# EAGLE board main_schematic3 (EAGLE 7.1.0)
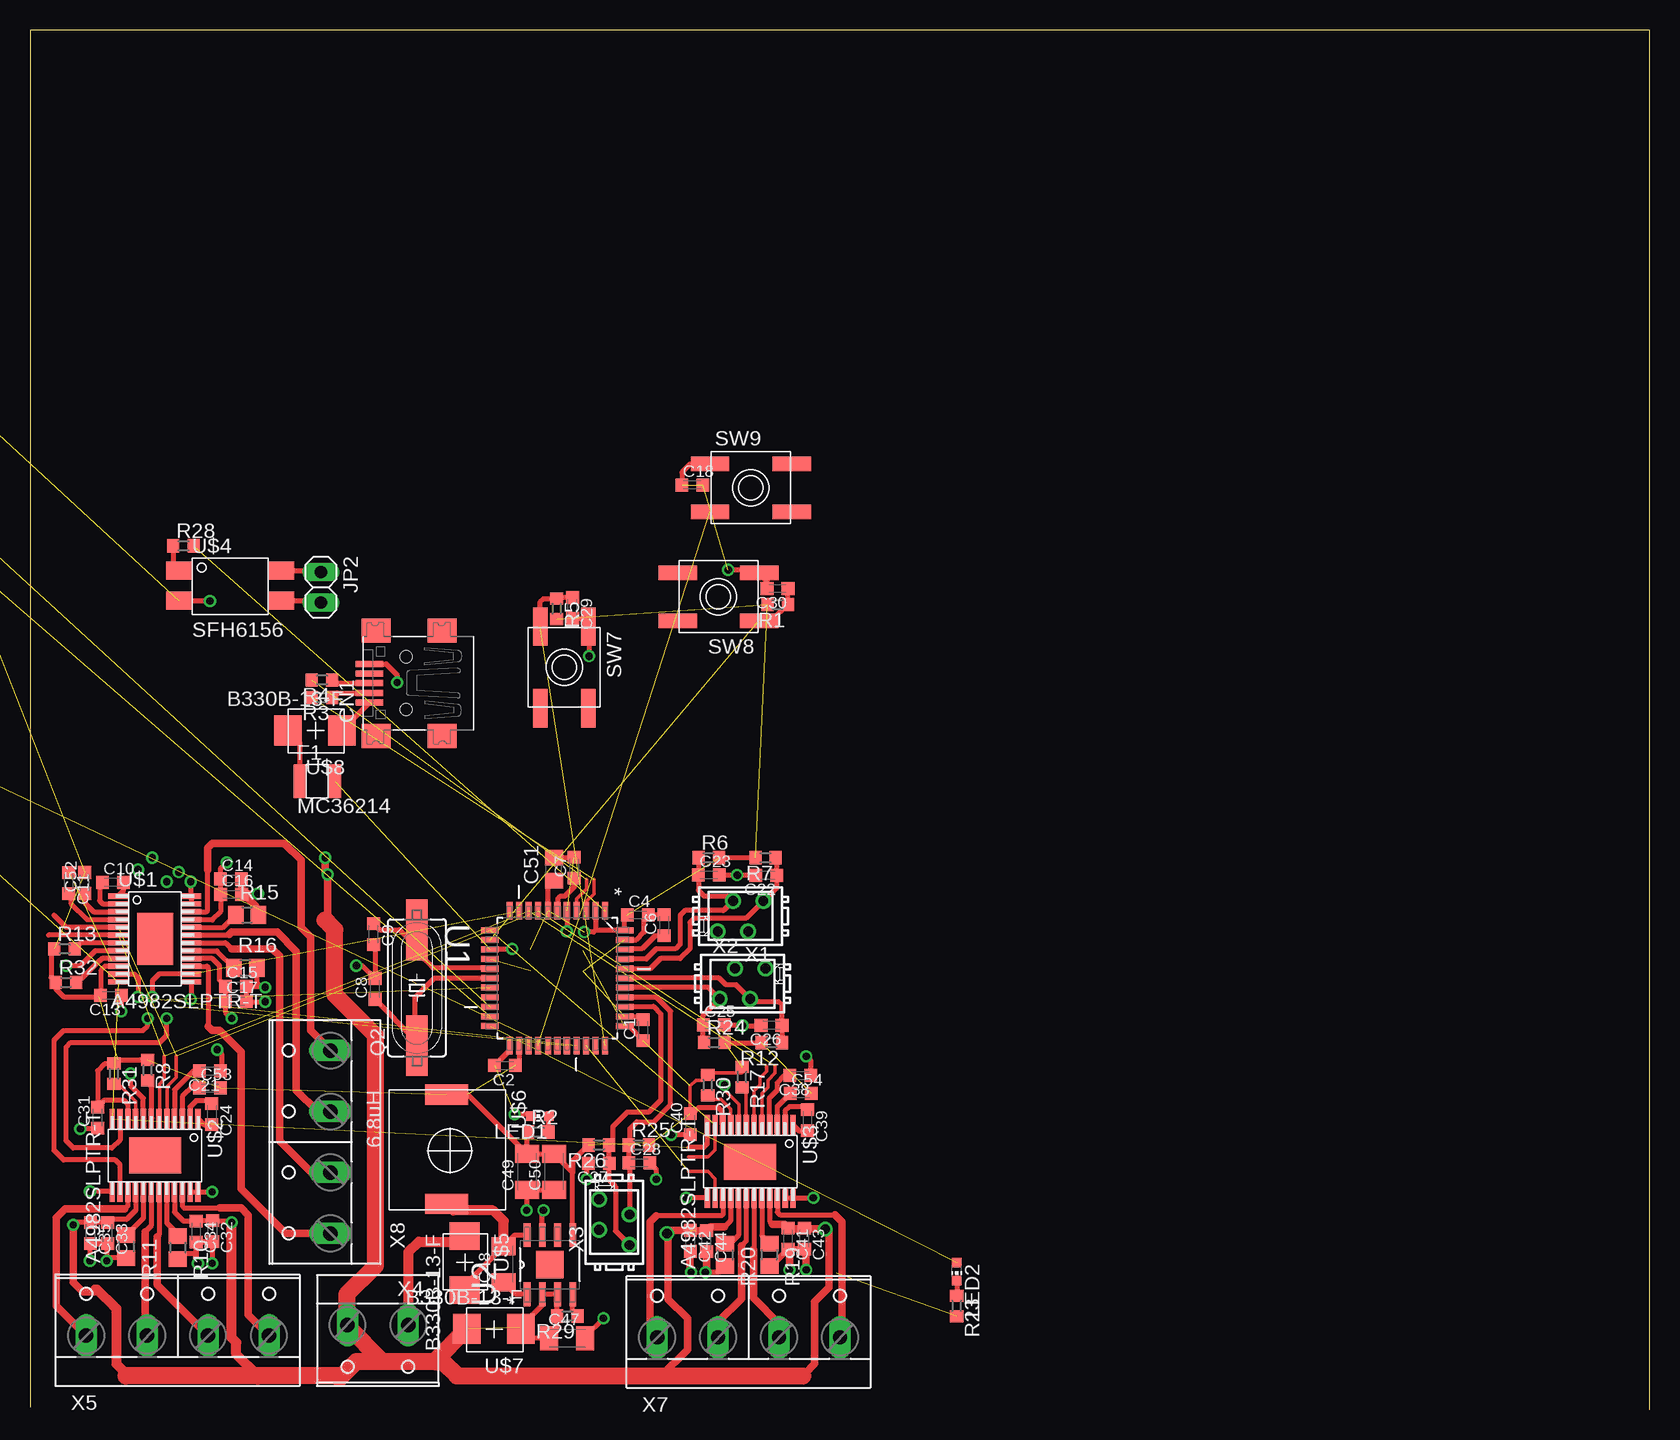
[diagram p0: board, top side]
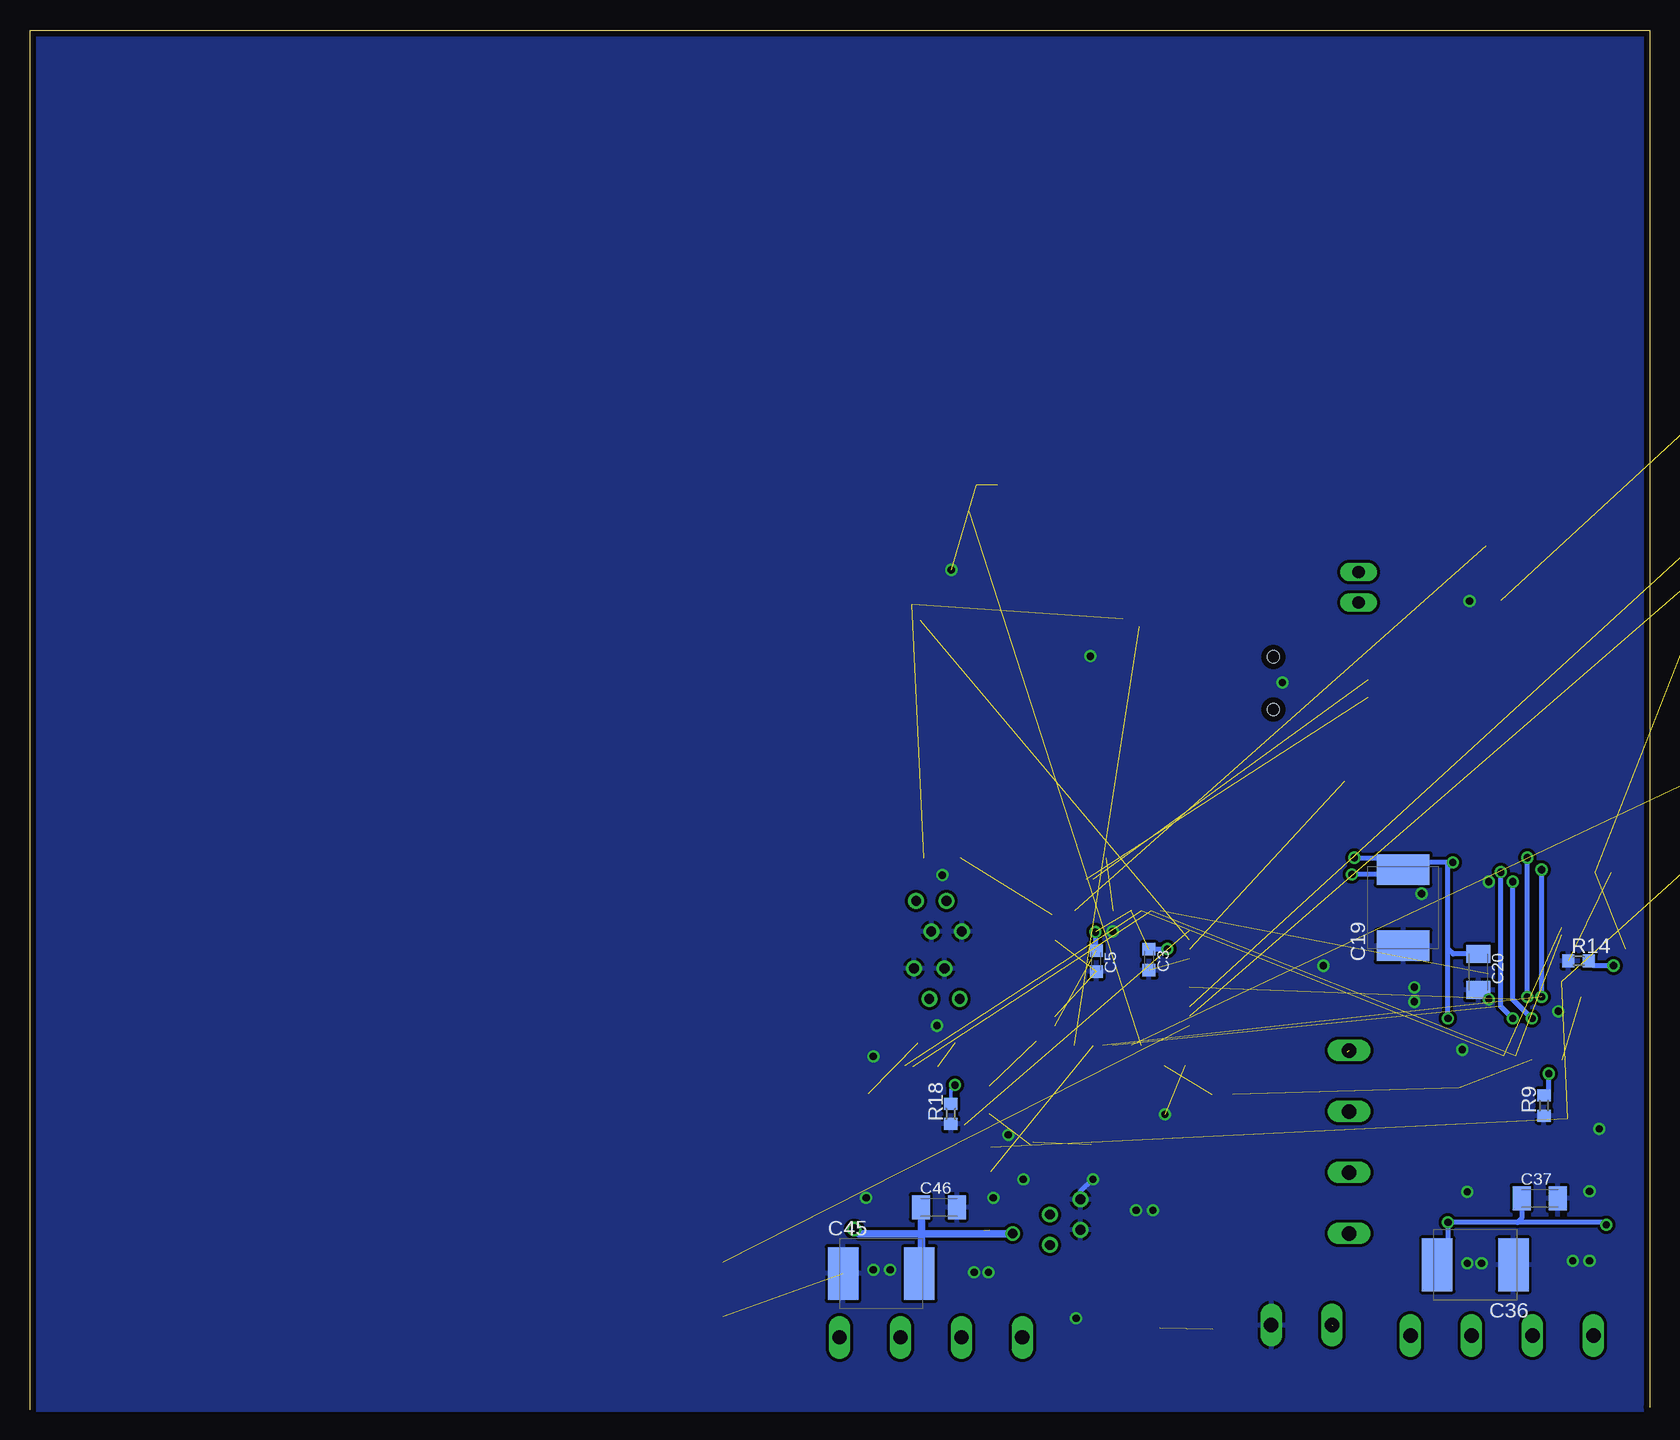
[diagram p1: board, bottom side, seen from below]

Size 135 x 115 mm. Coordinates in mm from the lower left corner, seen from the top.
Outline: 135,0 135,115 0,115 0,0.2
Copper layers (1*16): Top 0.035mm / dielectric 1.5mm / Bottom 0.035mm
Design rules "EDT_DRC": minimum track width 0.3mm, minimum drill 0.5mm, track to track 0.25mm, track to pad 0.25mm, pad to pad 0.25mm, via to via 0.25mm, smd to smd 0mil, copper to edge 0.5mm, drill to drill 8mil, minimum pad ring 10mil, minimum via ring 8mil, stop-mask expansion 4mil, vias tented up to drill 0mil, thermal gap 10mil

## Footprints (pad centres in the part's own frame; a part is rotated, then mirrored left to right if it is on the bottom)
C0603K = smd 1.05 x 1.08: 1 -0.875,0; 2 0.875,0
E/7260-38R = smd 2.55 x 4.4: + 3.175,0; - -3.175,0
C1206K = smd 1.5 x 2: 1 -1.5,0; 2 1.5,0
C0805 = smd 1.3 x 1.5: 1 -0.95,0; 2 0.95,0
USB-MINIB = smd 0.5 x 2.308: D+ 0,4.064; D- -0.8,4.064; GND 1.6,4.064; ID 0.8,4.064; VBUS -1.6,4.064 | smd 2 x 2.4: GND1 -4.4,-2; GND2 -4.4,3.5; GND3 4.4,3.5; GND4 4.4,-2 | hole 1: -2.2,1; 2.2,1
MC36214 = smd 1 x 2.8: P$1 0.239,1.4; P$2 3.196,1.39
1X04 = drill 1.016 long: 1 -3.81,0; 2 -1.27,0; 3 1.27,0; 4 3.81,0
1X02 = drill 1.016 long: 1 -1.27,0; 2 1.27,0
CHIP-LED0603 = smd 0.8 x 0.8: A 0,-0.75; C 0,0.75
SM49 = smd 5.08 x 1.778: 1 -4.826,0; 2 4.826,0
R0603 = smd 1 x 1.1: 1 -0.85,0; 2 0.85,0
R0805 = smd 1.3 x 1.5: 1 -0.95,0; 2 0.95,0
EVQ-Q2 = smd 3.2 x 1.2: A -3.4,-2; A' 3.4,-2; B -3.4,2; B' 3.4,2
QFP80P1200X1200X120-44N = smd 1.473 x 0.508: 1 -5.613,3.988; 2 -5.613,3.2; 3 -5.613,2.388; 4 -5.613,1.6; 5 -5.613,0.787; 6 -5.613,0; 7 -5.613,-0.787; 8 -5.613,-1.6; 9 -5.613,-2.388; 10 -5.613,-3.2; 11 -5.613,-3.988; 23 5.613,-3.988; 24 5.613,-3.2; 25 5.613,-2.388; 26 5.613,-1.6; 27 5.613,-0.787; 28 5.613,0; 29 5.613,0.787; 30 5.613,1.6; 31 5.613,2.388; 32 5.613,3.2; 33 5.613,3.988 | smd 0.508 x 1.473: 12 -3.988,-5.613; 13 -3.2,-5.613; 14 -2.388,-5.613; 15 -1.6,-5.613; 16 -0.787,-5.613; 17 0,-5.613; 18 0.787,-5.613; 19 1.6,-5.613; 20 2.388,-5.613; 21 3.2,-5.613; 22 3.988,-5.613; 34 3.988,5.613; 35 3.2,5.613; 36 2.388,5.613; 37 1.6,5.613; 38 0.787,5.613; 39 0,5.613; 40 -0.787,5.613; 41 -1.6,5.613; 42 -2.388,5.613; 43 -3.2,5.613; 44 -3.988,5.613
SOIC127P600X175-9N = smd 1.981 x 0.559: 1 -2.464,1.905; 2 -2.464,0.635; 3 -2.464,-0.635; 4 -2.464,-1.905; 5 2.464,-1.905; 6 2.464,-0.635; 7 2.464,0.635; 8 2.464,1.905 | smd 2.286 x 2.286: 9 0,0
TSSOP_24 = smd 1.65 x 0.45: P1 -3.175,3.67; P2 -3.175,3.02; P3 -3.175,2.37; P4 -3.175,1.72; P5 -3.175,1.07; P6 -3.175,0.42; P7 -3.175,-0.23; P8 -3.175,-0.88; P9 -3.175,-1.53; P10 -3.175,-2.18; P11 -3.175,-2.83; P12 -3.175,-3.48; P13 2.925,-3.48; P14 2.925,-2.83; P15 2.925,-2.18; P16 2.925,-1.53; P17 2.925,-0.88; P18 2.925,-0.23; P19 2.925,0.42; P20 2.925,1.07; P21 2.925,1.72; P22 2.925,2.37; P23 2.925,3.02; P24 2.925,3.67 | smd 3 x 4.32: P$1 -0.102,0.099
SFH6165 = smd 2.1 x 1.5: P1 -1.13,3.656; P2 -1.12,1.156; P3 7.446,1.156; P4 7.442,3.656
B330B-13-F = smd 2.3 x 2.5: P$1 -2.2,-0.022; P$2 2.299,-0.022
VLF10040 = smd 1.7 x 3.6: P$1 0.4,4.8; P$2 9.51,4.8
MICROMATCH-4 = drill 0.813: 1 1.905,1.27; 2 0.635,-1.27; 3 -0.635,1.27; 4 -1.905,-1.27
W237-132 = drill 1.194 long: 1 -2.54,-0.635; 2 2.54,-0.635
W237-4P = drill 1.194 long: 1 -7.62,-0.635; 2 -2.54,-0.635; 3 2.54,-0.635; 4 7.62,-0.635

## Placement (x,y rotation side)
C1  100nF  [C0603K]  51.12,31.61 90 top
C2  100nF  [C0603K]  39.59,28.67 180 top
C3  100nF  [C0603K]  41.72,37.49 270 bottom
C4  100nF  [C0603K]  50.66,41.23 0 top
C5  100nF  [C0603K]  46.12,37.39 270 bottom
C6  100nF  [C0603K]  52.87,40.36 90 top
C7  1uF  [C0603K]  45.36,45.16 90 top
C8  18pF  [C0603K]  28.76,35.06 90 top
C9  18pF  [C0603K]  28.64,39.62 270 top
C10  100nF  [C0603K]  6.9,43.95 0 top
C11  220nF  [C0603K]  3.23,43.89 270 top
C12  100nF  [C0603K]  -72.39,106.68 0 top  (outside the outline)
C13  100nF  [C0603K]  6.74,34.52 180 top
C14  100nF  [C0603K]  16.76,44.23 0 top
C15  100nF  [C0603K]  17.16,35.28 0 top
C16  1uF  [C0603K]  16.77,42.94 0 top
C17  1uF  [C0603K]  17.16,34.04 0 top
C18  100nF  [C0603K]  55.21,77.08 0 top
C19  100uF  [E/7260-38R]  20.54,41.83 90 bottom
C20  10uF  [C1206K]  14.28,36.47 270 bottom
C21  220nF  [C0603K]  14.99,28.22 180 top
C22  100nF  [C0603K]  61.36,44.54 180 top
C23  100nF  [C0603K]  56.59,44.56 0 top
C24  100nF  [C0603K]  15.16,24.61 270 top
C25  100nF  [C0603K]  56.99,32.06 0 top
C26  100nF  [C0603K]  61.81,32.04 180 top
C27  100nF  [C0603K]  47.41,20.54 180 top
C28  100nF  [C0603K]  50.79,20.56 0 top
C29  100nF  [C0603K]  45.21,66.81 270 top
C30  100nF  [C0603K]  62.31,68.44 180 top
C31  100nF  [C0603K]  5.64,24.34 90 top
C32  100nF  [C0603K]  15.21,14.86 270 top
C33  100nF  [C0603K]  6.46,14.71 270 top
C34  1uF  [C0603K]  13.85,14.85 270 top
C35  1uF  [C0603K]  5.04,14.71 270 top
C36  100uF  [E/7260-38R]  14.52,12.06 180 bottom
C37  10uF  [C1206K]  9.15,17.62 0 bottom
C38  220nF  [C0603K]  64.21,27.84 180 top
C39  100nF  [C0603K]  64.81,24.11 270 top
C40  100nF  [C0603K]  55.04,23.79 90 top
C41  100nF  [C0603K]  63.19,14.26 270 top
C42  100nF  [C0603K]  55.04,14.06 270 top
C43  1uF  [C0603K]  64.55,14.25 270 top
C44  1uF  [C0603K]  56.39,14.03 270 top
C45  100uF  [E/7260-38R]  64.04,11.34 0 bottom
C46  10uF  [C1206K]  59.23,16.87 0 bottom
C47  10uF  [C1206K]  44.79,5.92 0 top
C48  100nF  [C1206K]  39.48,12.11 90 top
C49  22uF  [C1206K]  41.43,19.81 90 top
C50  22uF  [C1206K]  43.68,19.83 90 top
C51  10uF  [C0805]  43.67,45.05 90 top
C52  100nF  [C0603K]  4.55,43.9 90 top
C53  100nF  [C0603K]  15,26.8 0 top
C54  100nF  [C0603K]  64.25,26.35 0 top
CN1  [USB-MINIB]  32.36,60.55 90 top
F1  MC36214  [MC36214]  22.23,50.97 0 top
JP1  [1X04]  -19.05,95.25 0 top  (outside the outline)
JP2  [1X02]  24.25,68.54 270 top
LED1  [CHIP-LED0603]  42.51,24.46 90 top
LED2  [CHIP-LED0603]  77.25,11.51 180 top
Q2  16MHz  [SM49]  32.26,35.16 90 top
R1  10k  [R0603]  62.32,67.1 180 top
R2  0.33k  [R0603]  42.39,23.12 0 top
R3  22  [R0603]  24.33,59.35 180 top
R4  22  [R0603]  24.34,60.82 180 top
R5  10k  [R0603]  43.9,66.75 270 top
R6  10k  [R0603]  56.57,46 0 top
R7  10k  [R0603]  61.31,46 180 top
R8  10k  [R0603]  9.8,28.29 270 top
R9  10k  [R0603]  8.8,25.33 90 bottom
R10  0.1  [R0805]  12.32,13.5 270 top
R11  0.1  [R0805]  8.03,13.58 270 top
R12  10k  [R0603]  61.82,30.58 180 top
R13  10k  [R0603]  2.89,38.4 0 top
R14  10k  [R0603]  5.91,37.4 0 bottom
R15  0.1  [R0805]  18.1,41.23 0 top
R16  0.1  [R0805]  17.95,36.83 0 top
R17  10k  [R0603]  59.35,27.72 270 top
R18  10k  [R0603]  58.25,24.65 90 bottom
R19  0.1  [R0805]  61.63,12.9 270 top
R20  0.1  [R0805]  57.93,12.9 270 top
R21  1k  [R0603]  -36.83,101.6 0 top  (outside the outline)
R22  1k  [R0603]  -41.91,101.6 0 top  (outside the outline)
R23  330  [R0603]  77.25,8.64 270 top
R24  10k  [R0603]  57.03,30.6 0 top
R25  10k  [R0603]  50.75,22.05 0 top
R26  10k  [R0603]  47.43,22.05 180 top
R27  3.9k  [R0603]  -97.79,96.52 0 top  (outside the outline)
R28  180  [R0603]  12.8,72 0 top
R29  100k  [R0603]  44.8,7.8 180 top
R30  10k  [R0603]  56.5,27.05 270 top
R31  10k  [R0603]  7,28 270 top
R32  10k  [R0603]  3,35.6 0 top
SW7  SPST_TACT-EVQQ2  [EVQ-Q2]  44.54,61.87 270 top
SW8  SPST_TACT-EVQQ2  [EVQ-Q2]  57.39,67.76 180 top
SW9  SPST_TACT-EVQQ2  [EVQ-Q2]  60.09,76.84 0 top
U1  ATMEGA32U4-AU  [QFP80P1200X1200X120-44N]  43.96,35.96 270 top
U2  ADP2302ARDZ-5.0-R7  [SOIC127P600X175-9N]  43.34,12.07 90 top
U$1  A4982SLPTR-T  [TSSOP_24]  10.52,39.13 0 top
U$2  A4982SLPTR-T  [TSSOP_24]  10.33,21.07 270 top
U$3  A4982SLPTR-T  [TSSOP_24]  59.93,20.56 270 top
U$4  SFH6156  [SFH6165]  13.52,66.29 0 top
U$5  B330B-13-F  [B330B-13-F]  36.25,12.26 270 top
U$6  6.8uH  [VLF10040]  29.93,26.66 270 top
U$7  B330B-13-F  [B330B-13-F]  38.7,6.7 180 top
U$8  B330B-13-F  [B330B-13-F]  23.8,56.6 180 top
X1  MICROMATCH-4  [MICROMATCH-4]  59.23,41.13 180 top
X2  MICROMATCH-4  [MICROMATCH-4]  59.4,35.5 0 top
X3  MICROMATCH-4  [MICROMATCH-4]  48.7,15.62 90 top
X4  [W237-132]  29,6.4 180 top
X5  [W237-4P]  12.3,6.8 0 top
X7  [W237-4P]  59.9,6.65 0 top
X8  [W237-4P]  24.4,22.3 90 top

## Library data of the parts
C1-C54 R1-R32 = rcl
CN1 LED1 LED2 SW7-SW9 = adafruit
F1 = PTC
JP1 JP2 = pinhead
Q2 = crystal; OC_FARNELL: unknown; OC_NEWARK: unknown
U1 = ATmega32U4; MPN: ATMEGA32U4-AU; OC_FARNELL: 1748525; OC_NEWARK: 26R5633; PACKAGE: TQFP-44; SUPPLIER: Atmel
U2 = ADP2302ARDZ-5.0-R7; MPN: ADP2302ARDZ-5.0-R7; OC_FARNELL: 2312892; OC_NEWARK: 67W2704; PACKAGE: SOIC-8; SUPPLIER: Analog Devices
U$1-U$3 = Allegro_A4982_driver
U$4 = SFH6156
U$5 U$7 U$8 = schottky_B330B-13-F
U$6 = InductorVLF10040
X1-X3 = con-amp-micromatch; MPN: 7-215464-4; OC_FARNELL: 3784629; OC_NEWARK: 19R8124
X4 X5 X7 X8 = con-wago-508; OC_FARNELL: unknown; OC_NEWARK: unknown

## Nets
ANALOG: C12.2 R27.1 U$1.P12 U$2.P12 U$3.P12
DEBUG_LED: LED2.A U1.22
DIR1: U1.10 U$1.P14
DIR2: U1.18 U$2.P14
DIR3: U1.31 U$3.P14
GND: C1.2 C2.2 C3.2 C4.2 C5.2 C6.2 C7.2 C8.2 C9.2 C11.1 C12.1 C13.1 C14.2 C15.2 C16.2 C17.2 C18.1 C18.2 C19.- C20.2 C21.1 C22.2 C23.2 C25.2 C26.2 C27.2 C28.2 C29.2 C30.2 C31.1 C32.2 C33.2 C34.2 C35.2 C36.- C37.2 C38.1 C40.1 C41.2 C42.2 C43.2 C44.2 C45.- C46.2 C47.2 C49.1 C50.1 C51.2 CN1.GND JP1.3 LED1.C R9.1 R10.2 R11.2 R14.1 R15.2 R16.2 R18.1 R19.2 R20.2 R23.2 SW7.B SW8.A SW9.B U1.5 U1.15 U1.23 U1.35 U1.43 U2.7 U$1.P13 U$1.P23 U$1.P24 U$2.P13 U$2.P23 U$2.P24 U$3.P13 U$3.P23 U$3.P24 U$4.P2 U$5.P$1 X1.1 X1.3 X2.1 X2.3 X3.1 X3.3 X4.1
HWB: C29.1 R5.1 SW7.A U1.33
KILL1: C28.1 R25.1 U1.37 X3.2
KILL2: C27.1 R26.1 U1.36 X3.4
KILL3: C26.1 R12.1 U1.39 X2.2
KILL4: C25.1 R24.1 U1.38 X2.4
KILL5: C23.1 R6.1 U1.41 X1.2
KILL6: C22.1 R7.1 U1.40 X1.4
MS1: U1.8 U$1.P5 U$2.P5 U$3.P5
MS2: U1.9 U$1.P6 U$2.P6 U$3.P6
N$1: JP2.1 U$4.P4
N$2: C6.1 U1.42
N$3: LED1.A R2.2
N$4: CN1.D- R3.1
N$5: CN1.D+ R4.1
N$6: C10.2 U$1.P1
N$7: C10.1 U$1.P2
N$8: U$1.P15 X8.1
N$9: U$1.P22 X8.4
N$10: C11.2 U$1.P4
N$11: C7.1 U1.6
N$12: R13.2 U$1.P7
N$13: C24.2 U$2.P1
N$14: R14.2 U$1.P8
N$15: R15.1 U$1.P20
N$16: R16.1 U$1.P17
N$17: C24.1 U$2.P2
N$18: U$1.P19 X8.3
N$19: R10.1 U$2.P20
N$20: U$1.P18 X8.2
N$21: R11.1 U$2.P17
N$22: U$2.P22 X5.4
N$23: U$2.P15 X5.1
N$24: U$2.P19 X5.3
N$25: U$2.P18 X5.2
N$26: C21.2 U$2.P4
N$27: R8.2 U$2.P7
N$28: R9.2 U$2.P8
N$29: C39.2 U$3.P1
N$30: C39.1 U$3.P2
N$31: R19.1 U$3.P20
N$32: R20.1 U$3.P17
N$33: U$3.P22 X7.4
N$34: U$3.P15 X7.1
N$35: U$3.P19 X7.3
N$36: U$3.P18 X7.2
N$37: C38.2 U$3.P4
N$38: R17.2 U$3.P7
N$39: CN1.VBUS U$8.P$1
N$40: JP1.1 R21.1
N$41: JP1.2 R22.1
N$42: JP2.2 U$4.P3
N$43: R18.2 U$3.P8
N$44: LED2.C R23.1
N$45: R29.1 U2.4
N$47: C48.1 U2.1
N$48: R28.1 U$4.P1
N$49: F1.P$1 U$8.P$2
N$50: C52.1 U$1.P3
N$51: C48.2 U2.8 U$5.P$2 U$6.P$2
N$52: C53.1 U$2.P3
N$53: C54.1 U$3.P3
N$78: R30.2 U$3.P9
N$95: R31.2 U$2.P9
N$98: R32.2 U$1.P9
N$102: C14.1 C15.1 C16.1 C17.1 C19.+ C20.1 C32.1 C33.1 C34.1 C35.1 C36.+ C37.1 C41.1 C42.1 C43.1 C44.1 C45.+ C46.1 C47.1 R29.2 U2.2 U2.3 U$1.P16 U$1.P21 U$2.P16 U$2.P21 U$3.P16 U$3.P21 U$7.P$1 U$7.P$2 X4.2
SHUTTER: R28.2 U1.1
START/STOP: SW9.A U1.26
STEP1: U1.30 U$1.P11
STEP2: U1.29 U$2.P11
STEP3: U1.12 U$3.P11
T0/OC4D: R27.2 U1.27
UART_RX: R21.2 U1.20
UART_TX: R22.2 U1.21
USB_D+: R4.2 U1.4
USB_D-: R3.2 U1.3
VCC: C1.1 C2.1 C3.1 C4.1 C5.1 C13.2 C31.2 C40.2 C49.2 C50.2 C51.1 C52.2 C53.2 C54.2 F1.P$2 JP1.4 R1.2 R2.1 R5.2 R6.2 R7.2 R8.1 R12.2 R13.1 R17.1 R24.2 R25.2 R26.2 R30.1 R31.1 R32.1 U1.2 U1.7 U1.14 U1.24 U1.34 U1.44 U2.5 U$1.P10 U$2.P10 U$3.P10 U$6.P$1
XTAL1: C8.1 Q2.1 U1.17
XTAL2: C9.1 Q2.2 U1.16
~RESET: C30.1 R1.1 SW8.B U1.13

## Tracks (layer width: path | path; a pad name or v marks a point on that pad's centre or on a via)
ANALOG  (4 unrouted)
  Top 0.406: U$3.P12 56.45,22.15 56.15,21.85 54.9,21.85
DEBUG_LED  (1 unrouted)
DIR1  (via drill 0.6)  (1 unrouted)
  Top 0.406: U$1.P14 10.75,36.3 10.2,35.75 v10.2,34.4
  Bottom 0.406: v10.2,34.4 v10.2,46
DIR2  (via drill 0.6)  (1 unrouted)
  Top 0.406: U$2.P14 7.5,20.4 7.1,20.8 2.8,20.8 2,21.6 2,30.8 2.8,31.6 9.4,31.6 9.8,32 v9.8,32.6
  Bottom 0.406: v9.8,32.6 11.4,34.2 v11.4,44
DIR3  (1 unrouted)
  Top 0.305: U$3.P14 57.1,19.25 56.5,19.85 54.9,19.85
GND  (via drill 0.6)  (11 unrouted)
  Top 0.406: U$3.P23 U$3.P24 63.62,17.65 v65.3,17.65 | C43.2 C41.2 61.76,11.95 R19.2 61.8,11.95 63.3,13.45 64.7,13.45 | U$3.P13 56.44,17.65 v54.7,17.65 | v56.3,11.45 57.4,11.45 57.9,11.95 R20.2 | C38.1 65.08,29.07 v64.7,29.45 | C40.1 53.47,22.91 v53.45,22.9 | U1.23 39.97,29.93 C2.2 | U1.35 50.84,32.76 C1.2 | U1.5 v44.75,39.85 | C51.2 45.33,46 C7.2 | SW8.A 61.44,69.11 C30.2 61.44,68.97 60.4,70 v58.2,70 | SW7.B 45.88,65.94 C29.2 46.06,65.94 46.4,65.6 46.4,64.2 46.6,64 v46.6,62.8 | SW9.B 55.44,78.84 55.4,78.8 55,78.8 54.34,78.14 C18.1 | LED1.C 41.7,24.6 v40.4,24.6 | C23.2 58.89,44.56 58.9,44.55 v58.95,44.55 C22.2 | C25.2 59.34,32.06 v59.4,32 60.9,32 C26.2 | U1.43 50.56,39.16 51.2,39.8 51.2,40.9 C4.2 C6.2 | CN1.GND 29.7,62.15 30.6,61.25 v30.6,60.6 | C21.1 16,28.36 16,29.6 v15.6,30 | C31.1 5.58,23.4 v4.2,23.4 | U$2.P13 6.79,18.2 v5,18.2 | U$2.P23 U$2.P24 v15.2,18.15 | C32.2 C34.2 13.85,12.35 | C35.2 C33.2 C35.2 5,13.8 | v5,12.4 5,13.8 | 5,13.8 6.4,13.8 v6.4,12.4 6.63,12.63 R11.2 | 13.85,12.35 v14,12.2 | 13.85,12.35 13.8,12.4 13.8,13 | v15.2,12.2 15.2,14 13.8,14 13.8,13 | 13.8,13 12.77,13 R10.2 | U$4.P2 14.95,67.45 v15,67.4 | C49.1 41.49,18.31 | U2.7 42.7,16.5 v42.8,16.6 | 41.49,18.31 41.4,18.4 v41.4,16.6 | 41.49,18.31 43.66,18.31 C50.1 | C47.2 46.29,6.09 v47.8,7.6 | U$1.P23 U$1.P24 13.45,43.95 v13.4,44 | C15.2 C17.2 | C15.2 C17.2 18,34 v19.6,34 | C15.2 19.2,35.28 | 19.2,35.28 19.52,35.28 v19.6,35.2 | R16.2 18.9,35.58 19.2,35.28 | C13.1 7.62,33.22 v7.6,33.2 | U$1.P13 13.45,34.24 v13.4,34.2 | C28.2 52.2,20.02 v52.2,19.2 | C27.2 46.4,20.41 v46.4,19.2 | C9.2 28.76,38.62 C8.2 27.7,37 v27.2,37
  Top 0.61: C44.2 56.39,11.54 v56.3,11.45 | C42.2 55.04,11.51 v55.1,11.45 | 64.7,13.45 v64.7,11.65 | 63.3,13.45 v63.3,11.65 | C14.2 C16.2 | C16.2 17.7,43 v19,43 | R15.2 18.8,41.48 18.8,42 17.86,42.94 C16.2
  Top 0.813: U$5.P$1 35.77,14 32.4,14 31.54,13.14 X4.1
  Bottom 0.406: v46.4,19.2 47.43,18.17 X3.1
  pour Bottom: 0,0 134.5,0 134.5,114.5 0,114.5
HWB  (1 unrouted)
  Top 0.406: SW7.A 42.54,67.34 42.8,67.6 R5.1 43.98,67.69 C29.1
KILL1
  Top 0.406: X3.2 49.97,20.5 C28.1 49.91,22.04 R25.1 50,22.15 50,23.4 50.6,24 52,24 53.4,25.4 53.4,33.2 52.24,34.36 U1.37
KILL2
  Top 0.406: X3.4 48.8,14.88 48.8,18.6 48.28,19.11 C27.1 R26.1 48.6,22.37 48.6,23.6 49.8,24.8 51.6,24.8 52.6,25.8 52.6,33 52,33.6 51.95,33.6 51.92,33.57 U1.36
KILL3
  Top 0.406: R12.1 62.67,32.02 C26.1 62.69,33.72 62.4,34 60.27,34 X2.2 58.87,35.4 58,35.4 57.44,35.96 U1.39
KILL4
  Top 0.406: R24.1 56.12,30.66 C25.1 56.12,32.85 X2.4 56.55,35.17 U1.38
KILL5
  Top 0.406: R6.1 C23.1 55.72,43.28 56.2,42.8 58.2,42.8 X1.2 57.8,41.6 54.6,41.6 54.2,41.2 54.2,38.8 53.8,38.4 52.2,38.4 51.36,37.56 U1.41
KILL6
  Top 0.406: R7.1 62.23,45.92 C22.1 62.23,43.5 X1.4 59.69,40.95 55.35,40.95 55,40.6 55,38.4 54.2,37.6 52.55,37.6 51.7,36.75 U1.40
MS1  (3 unrouted)
  Top 0.305: U$3.P5 61,26.35 61.5,26.85 61.5,27.45 62.1,28.05 62.1,28.65 | U$2.P5 11.45,24.3 11.45,26.95 12.2,27.7 12.2,29.5
  Top 0.406: U$1.P5 3,40.2 2,41.2
MS2  (3 unrouted)
  Top 0.305: U$3.P6 60.35,26.55 60.85,27.05 60.85,27.65 61.4,28.2 61.4,28.6 | U$2.P6 10.8,24.3 10.8,27.15 11.2,27.55 11.2,29.5
  Top 0.406: U$1.P6 1.55,39.55
N$1
  Top 0.406: U$4.P4 24.11,69.95 JP2.1
N$2
  Top 0.406: C6.1 52.09,39.48 51,38.4 49.63,38.4 U1.42
N$3
  Top 0.406: R2.2 43.24,24.44 LED1.A
N$4
  Top 0.406: R3.1 25.58,59.75 CN1.D-
N$5
  Top 0.406: R4.1 25.46,60.55 CN1.D+
N$6
  Top 0.406: C10.2 7.78,43.23 U$1.P1
N$7
  Top 0.406: C10.1 5.95,43.95 5.8,43.8 5.8,42.4 6.05,42.15 U$1.P2
N$8
  Top 0.406: U$1.P15 14.75,36.95 14.85,36.85 14.85,31.95
  Top 0.61: 14.85,31.95 15.2,31.6 15.8,31.6 17.6,29.8 17.6,18.4 21.32,14.68 X8.1
N$9  (1 unrouted)
  Top 0.406: U$1.P22 14.7,41.5 14.8,41.6 14.8,45
  Top 0.61: 14.8,45 14.8,46.8 15.2,47.2 21.2,47.2 22.6,45.8 22.6,40.2 23.4,39.4 23.4,31.6 25.2,29.8
N$10
  Top 0.406: C11.2 3.4,42.84 3.4,42.2 4.75,40.85 U$1.P4
N$11
  Top 0.406: U1.6 44,41.61 44,42.6 44.2,42.8 44.6,42.8 45.36,43.56 C7.1
N$12
  Top 0.406: U$1.P7 4.24,38.9 R13.2
N$13
  Top 0.406: U$2.P1 14.51,23.73 C24.2
N$14  (via drill 0.6)
  Top 0.406: U$1.P8 5.45,38.25 4.2,37 v3,37
  Bottom 0.406: v3,37 4.66,37 R14.2
N$15
  Top 0.406: U$1.P20 16.12,40.2 R15.1
N$16
  Top 0.406: U$1.P17 15.58,38.25 R16.1
N$17
  Top 0.406: C24.1 14.89,25.75 13.85,25.75 13.35,25.25 U$2.P2
N$18
  Top 0.406: U$1.P19 16.55,39.55 16.6,39.6
  Top 0.61: 16.6,39.6 16.8,39.8 20.6,39.8 22.2,38.2 22.2,26.6 23.96,24.84 X8.3
N$19
  Top 0.406: U$2.P20 11.4,15.55 12.32,14.63 R10.1
N$20
  Top 0.406: U$1.P18 16.3,38.9 16.8,38.4
  Top 0.61: 16.8,38.4 20.2,38.4 20.8,37.8 20.8,22.4 23.44,19.76 X8.2
N$21
  Top 0.406: U$2.P17 9.45,15.95 R11.1
N$22
  Top 0.406: U$2.P22 12.7,16.95 12.85,16.8 15.8,16.8
  Top 0.61: 15.8,16.8 17.6,16.8 18.2,16.2 18.2,7.88 X5.4
N$23
  Top 0.406: U$2.P15 8.15,17 7.9,16.75
  Top 0.61: 7.9,16.75 2.95,16.75 2.2,16 2.2,8.64 X5.1
N$24
  Top 0.406: U$2.P19 10.75,14.55 10.6,14.4
  Top 0.61: 10.6,14.4 10.6,10.4 X5.3
N$25
  Top 0.406: U$2.P18 10.1,15.3 9.6,14.8
  Top 0.61: 9.6,14.8 9.6,6.33 X5.2
N$26
  Top 0.406: C21.2 14.1,28.2 13.6,28.2 12.05,26.65 U$2.P4
N$27
  Top 0.406: U$2.P7 10.15,24.3 10.15,26.9 9.8,27.25 R8.2
N$28  (via drill 0.6)
  Top 0.406: U$2.P8 9.45,25.95 8.4,27 v8.4,28
  Bottom 0.305: R9.2 8.4,26.58
  Bottom 0.406: 8.4,26.58 v8.4,28
N$29
  Top 0.406: U$3.P1 64.1,23.23 C39.2
N$30
  Top 0.406: C39.1 64.55,25.25 63.3,25.25 62.95,24.9 U$3.P2
N$31
  Top 0.406: U$3.P20 61,14.48 R19.1
N$32
  Top 0.406: U$3.P17 59.05,14.52 58.38,13.85 R20.1
N$33
  Top 0.406: U$3.P22 62.3,16.45 62.5,16.25 67.1,16.25
  Top 0.61: 67.1,16.25 67.7,15.65 67.7,6.2 X7.4
N$34
  Top 0.406: U$3.P15 57.75,16.25 57.65,16.15 52.2,16.15 | 52.3,6.04 X7.1
  Top 0.61: 52.2,16.15 51.7,15.65 51.7,6.59 X7.1
N$35
  Top 0.406: U$3.P19 60.35,13.4 60.3,13.35
  Top 0.61: 60.3,13.35 60.3,9.3 62.44,7.16 X7.3
N$36
  Top 0.406: U$3.P18 59.7,14.05 59.3,13.65
  Top 0.61: 59.3,13.65 59.3,9.25 57.36,7.31 X7.2
N$37
  Top 0.406: U$3.P4 61.65,26 62.3,26.65 62.3,27.25 62.89,27.84 C38.2
N$38
  Top 0.305: U$3.P7 59.7,26.52 R17.2
N$39
  Top 0.406: CN1.VBUS 26,56.65 U$8.P$1
N$40  (1 unrouted)
N$41  (1 unrouted)
N$42
  Top 0.406: U$4.P3 23.75,67.45 23.8,67.4 24.12,67.4 JP2.2
N$43  (via drill 0.6)
  Top 0.305: U$3.P8 59.1,23.79 59.1,25.45 57.9,26.65 v57.9,27.05
  Bottom 0.305: v57.9,27.05 58.25,26.7 R18.2
N$44
  Top 0.406: LED2.C R23.1
N$45
  Top 0.406: R29.1 45.24,8.21 U2.4
N$47
  Top 0.406: U2.1 40.48,9.61 C48.1
N$48
  Top 0.406: R28.1 11.95,70.39 U$4.P1
N$49
  Top 0.406: U$8.P$2 22.47,55.65 F1.P$1
N$50
  Top 0.406: C52.1 4.6,42.98 4.6,42.2 5.3,41.5 U$1.P3
N$51
  Top 0.406: U2.8 40.4,14.53 C48.2 36.23,10.36 U$5.P$2 | 35.28,16.6 U$6.P$2
  Top 0.813: C48.2 39.48,15.72 38.6,16.6 35.28,16.6
N$52
  Top 0.406: C53.1 13.93,27 13.6,27 12.7,26.1 U$2.P3
N$53
  Top 0.406: U$3.P3 62.3,25.27 C54.1
N$78
  Top 0.305: U$3.P9 58.4,25.05 57.6,25.85 56.85,25.85 R30.2
N$95
  Top 0.305: U$2.P9 8.8,25.7 7.35,27.15 R31.2
N$98
  Top 0.406: U$1.P9 6,37.6 5.8,37.4 5.75,37.4 4.25,35.9 4.15,35.9 R32.2
N$99
  Top 0.813: 5.4,10 5.6,10 7,8.6
N$100
  Top 0.813: 7.2,8.4 7.2,3.8 8.4,2.6
N$102  (via drill 0.6, 0.8)  (3 unrouted)
  Top 0.406: 62.9,15.43 C41.1 | 62.85,15.47 C41.1 | 62.99,15.13 C41.1 | C41.1 64.54,15.13 C43.1 | U$3.P16 58.4,15.75 57.9,15.25 | U$3.P21 61.65,15.7 61.9,15.45 | C41.1 62.88,15.45 63.1,15.45 63.3,15.25 63.3,15.05 | U$2.P21 12.05,16.45 12.78,15.72 C34.1 C32.1 16.66,15.73 v16.8,15.6 | U$2.P16 8.8,16.6 8.05,15.85 6.46,15.85 C33.1 | 6.46,15.61 C33.1 | C33.1 C35.1 3.79,15.59 v3.6,15.4 | U$7.P$1 41.7,5.92 C47.1 43.95,6.58 R29.2 43.95,8.95 44,9 44,9.58 U2.3 U2.2 42.7,8.71 40.8,6.8 | 35.86,7.26 U$7.P$2 | U$1.P21 13.49,40.8 15.2,40.8 15.89,41.49 C16.1 C14.1 15.88,45.09 v16.4,45.6 | U$1.P16 15.2,37.6 15.8,37 15.8,35.8 16.29,35.31 C15.1 C17.1 16.29,33.12 v16.8,32.6 | 24.8,40.6 25.2,40.2
  Top 0.61: 64.6,3 65.4,3.8 65.4,9 66.6,10.2 66.6,14.75 v66.3,15.05 63.3,15.05 | 55.46,14.9 C44.1 56.73,15.25 57.9,15.25 | 61.9,15.45 62.88,15.45 | C42.1 53.38,14.94 v53.1,14.65 53.2,14.55 53.2,9.2 54.8,7.6 54.8,5 52.6,2.8 52.2,2.8 | v3.6,15.4 3.6,10.6 4.4,9.8 5.4,9.8 | 24.6,40.8 24.4,41 | 24.8,40.6 v24.8,44.6 24.6,44.8 v24.6,46
  Top 0.813: 35.84,6.17 U$7.P$2 | 26.46,6.94 X4.2 29.2,4.29 29.2,4 29.4,4 | 27.2,4 27,4 25.8,2.8 | 25.8,2.6 25.6,2.8 19,2.8 17.2,4.6 17.2,5.6 16.8,6 v16.8,15.6
  Top 1.422: U$7.P$2 33.68,4 | 33.68,4 29.4,4 26.46,6.94 | 25.8,2.8 19,2.8 8,2.8 | 29.2,4 27.2,4 25.8,2.6 | 33.68,4 34.4,4 35.6,2.8 52.2,2.8 64.4,2.8 | 24.6,40.8 25.2,40.2 25.4,40 25.4,34.6 28.8,31.2 28.8,12 26.4,9.6 26.4,7
  Bottom 0.406: C36.+ 16.8,12.96 v16.8,15.6 11,15.6 | v3.6,15.4 3.8,15.6 11,15.6 | C37.1 10.65,15.95 11,15.6 | 16.8,45.6 v16.4,45.6 16.8,45.2 16.8,38.4 | 16.8,45.6 19.95,45.6 | 19.95,45.6 C19.+ | 16.8,38.4 v16.8,32.6 16.8,45.6 | C20.1 16.37,37.97 16.8,38.4 | 19.95,45.6 21,45.6 21.4,46 21.6,46 | v24.6,46 21.6,46 | 21.6,46 21.2,45.6 21.2,45 21.6,44.6 v24.8,44.6
  Bottom 0.61: 66.15,14.9 v66.3,15.05 65.9,14.65 60.7,14.65 | v53.1,14.65 60.7,14.65 | C45.+ 60.7,11.51 60.7,14.65 | C46.1 60.7,16.84 60.7,14.65
SHUTTER  (1 unrouted)
START/STOP  (1 unrouted)
STEP1  (via drill 0.6)  (1 unrouted)
  Top 0.406: U$1.P11 8.7,36.3 9,36 v9,34.4
  Bottom 0.406: v9,34.4 v9,45
STEP2  (via drill 0.6)  (1 unrouted)
  Top 0.406: U$2.P11 7.5,22.45 6.85,21.8 3.6,21.8 3,22.4 3,30.2 3.4,30.6 10.8,30.6 11.4,31.2 v11.4,32.6
  Bottom 0.406: v11.4,32.6 12.4,33.6 v12.4,44.8
STEP3  (1 unrouted)
  Top 0.305: U$3.P11 57.1,21.65 56.5,21.05 54.9,21.05
T0/OC4D  (1 unrouted)
UART_RX  (1 unrouted)
UART_TX  (1 unrouted)
USB_D+  (1 unrouted)
  Top 0.305: U1.4 45.56,42.56 46.4,43.4 46.4,44.2
USB_D-  (1 unrouted)
  Top 0.305: U1.3 46.35,42.35 47,43 47,44.2
VCC  (via drill 0.6)  (18 unrouted)
  Top 0.305: C40.2 55.04,26.99 55.5,27.45 56.05,27.45 R30.1 56.65,28.05 59.35,28.05 R17.1
  Top 0.406: U$3.P10 57.7,23.79 57.7,24.85 57.4,25.15 55.7,25.15 55.22,24.66 C40.2 | U1.24 40.76,28.96 C2.1 | U1.34 49.88,31.97 C1.1 | U1.7 43.2,41.6 43.2,43.8 43.5,44.1 C51.1 | U1.14 38.4,38.4 v40.2,38.4 | U1.2 47.16,39.96 | 47.16,39.96 47,39.8 v46.2,39.8 | 47.16,39.96 47.17,39.95 U1.44 49.57,41.02 C4.1 | R7.2 R6.2 | R24.2 57.9,30.58 R12.2 | U$2.P10 8.15,25.45 7.8,25.8 6.22,25.8 C31.2 5.64,28.24 6.2,28.8 6.95,28.8 R31.1 7.3,29.15 9.15,29.15 9.16,29.14 R8.1 | C49.2 43.66,21.31 C50.2 45.24,19.77 | U2.5 45.24,19.77 | U$6.P$1 36.48,26.26 C49.2 | C49.2 41.43,23.01 R2.1 | R13.1 2.04,38.34 1.75,38.05 1.75,36 R32.1 2.15,35.05 2.8,34.4 5.75,34.4 C13.2 5.9,34.55 5.9,36.6 6.25,36.95 U$1.P10 | R26.2 45.24,20.71 45.24,19.77 | R25.2 51.38,22.27
  Bottom 0.406: v40.2,38.4 40.23,38.37 C3.1 | v46.2,39.8 46.2,38.34 C5.1
XTAL1
  Top 0.406: 32.2,28.6 32.26,28.66 Q2.1 32.26,30.68 32.07,30.87 | C8.1 32.07,30.87 | U1.17 38.34,35.95 33.7,35.95 32.07,34.32 32.07,30.87
XTAL2
  Top 0.406: C9.1 29.14,40 30.8,40 31.8,39 32.2,39 | 32.2,39 32.26,39.06 Q2.2 | U1.16 38.29,36.8 33.6,36.8 32.2,38.2 32.2,39
~RESET  (1 unrouted)
  Top 0.406: C30.1 63.19,67.11 R1.1 61.87,65.8 61.6,65.8 61.56,65.76 SW8.B